# Altium PCB withoutTemplate.PcbDoc
Units mil, origin at the board's own origin, x right, y up, seen from the top; angles counter-clockwise.
Board outline 6000 x 4000 mil, 2 copper layers (Top Layer, Bottom Layer); 21 components, 96 nets, 125 pads, 0 vias.
Unrouted connection lines stored in the file: 35.
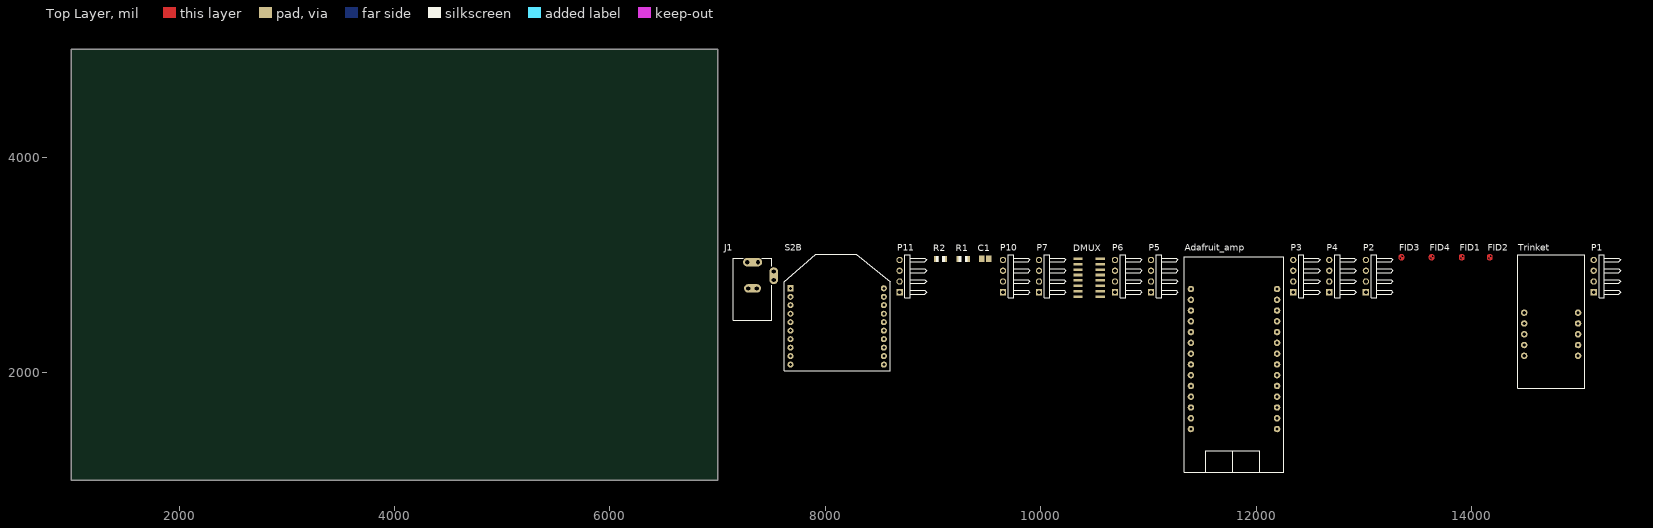
[diagram p0: Top Layer view]
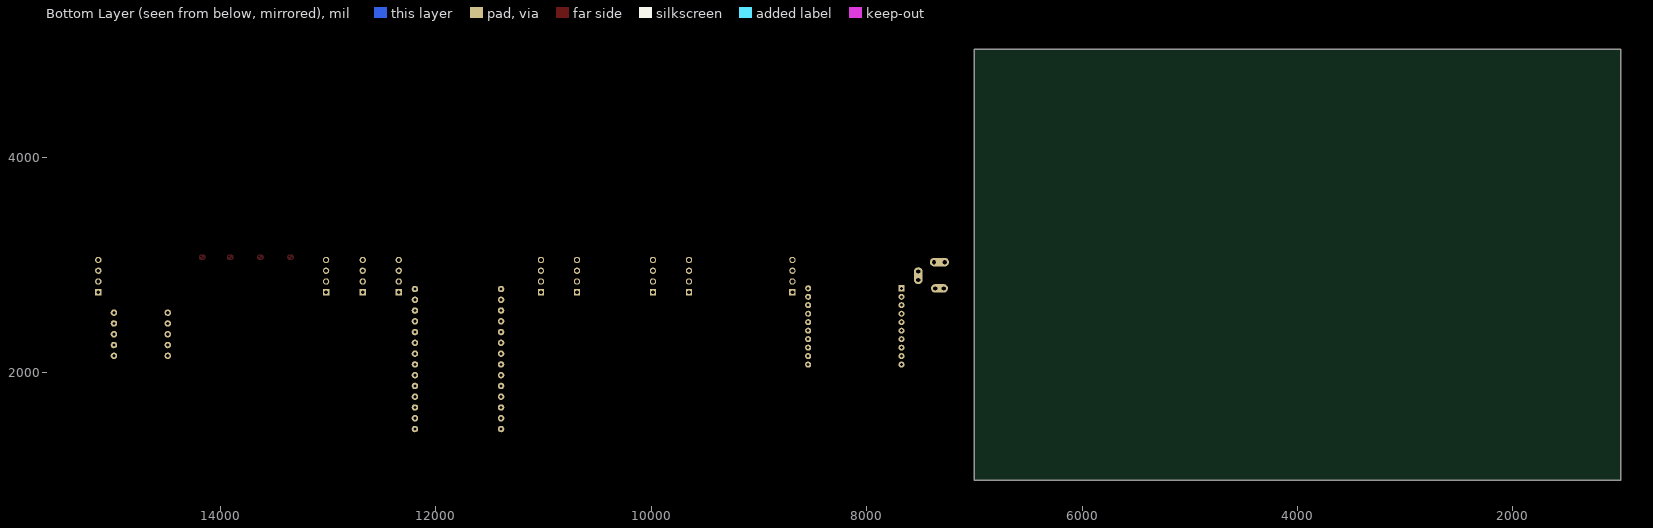
[diagram p1: Bottom Layer view, seen from below]

## Layer stack, top to bottom
Top Solder: solder mask 0.4, Solder Resist, Dk 3.5
Top Layer: signal copper 1.4
Dielectric 1: dielectric 12.6, FR-4, Dk 4.8
Bottom Layer: signal copper 1.4
Bottom Solder: solder mask 0.4, Solder Resist, Dk 3.5

## Board outline
1000,1000 7000,1000 7000,5000 1000,5000

## Design rules (kind name [scope] priority, off if disabled: settings)
Clearance [All] p1: gap=10
PolygonConnect [All] p1: connectstyle=Relief reliefconductorwidth=10 reliefentries=4 polygonreliefangle="90 Angle" airgapwidth=10
RoomDefinition BBB_Cape_template [InComponentClass('BBB_Cape_template')] p1: confinementstyle=ConfineIn formatcopy=TRUE lockcomponents=FALSE outline 7045,1065 15395,1065 15395,3205 7045,3205
RoutingVias [All] p1: holewidth=28 width=50 viastyle="Through Hole" minholewidth=28 minwidth=50 maxholewidth=28 maxwidth=50
SolderMaskExpansion [All] p1: expansion=4
UnpouredPolygon [All] p1: allowunpoured=FALSE
Width [All] p1: maxlimit=10 minlimit=10 preferedwidth=10
29 further rules are at their usual default settings.

## Classes and differential pairs
net class Xbee: DGND NetS2B_4 NetS2B_5 NetS2B_6 NetS2B_7 NetS2B_8 NetS2B_9 NetS2B_11 NetS2B_12 NetS2B_13 NetS2B_14 NetS2B_15 NetS2B_16 NetS2B_17 NetS2B_18 NetS2B_19 NetS2B_20 UART1_RXD UART1_TXD VDD_3V3B
net class Speaker: DGND NetAdafruit_amp_1 NetAdafruit_amp_2 NetAdafruit_amp_3 NetAdafruit_amp_4 NetAdafruit_amp_5 NetAdafruit_amp_6 NetAdafruit_amp_7 NetAdafruit_amp_8 NetAdafruit_amp_9 NetAdafruit_amp_10 NetAdafruit_amp_11 NetAdafruit_amp_12 NetAdafruit_amp_13 NetAdafruit_amp_16 NetAdafruit_amp_17 NetAdafruit_amp_18 NetAdafruit_amp_19 NetAdafruit_amp_20 NetAdafruit_amp_21 NetAdafruit_amp_22 NetAdafruit_amp_23 NetAdafruit_amp_24 NetAdafruit_amp_25 NetAdafruit_amp_26 NetAdafruit_amp_28 NetDMUX_3 NetDMUX_6 NetDMUX_9 NetDMUX_10 NetDMUX_11
net class Servo: AIN5 DGND EHRPWM1B NetAdafruit_amp_28 NetC1_1
net class Pin_Redef: I2C2_SCL I2C2_SDA
net class Motor: DGND EHRPWM2A EHRPWM2B GPIO0_27 GPIO1_15
net class LED: I2C2_SCL I2C2_SDA NetAdafruit_amp_28 NetP1_2 NetP1_3 NetP1_4 NetTrinket_3 NetTrinket_5 NetTrinket_6 NetTrinket_8 NetTrinket_10
net class Camera: NetP2_1 NetP2_2 NetP2_3 NetP2_4 NetP4_1 NetP4_2 NetP4_3 NetP4_4 NetP5_1 NetP5_2 NetP5_3 NetP5_4 NetP7_1 NetP7_2 NetP7_3 NetP7_4

## Components (designator, comment, footprint, x,y, rotation, side; value= is the part's Value field where it differs from the comment)
Adafruit_amp "Adafruit_2x2Amp" "adafruit_2x2w amp" 11335,1075 r0 top
C1 "47nF" C0805 9485,3055 r0 top
DMUX "CD74HC4067" so16 10450,2880 r90 top
FID1 "MECH-Fiducial" S_Fiducial 13910,3070 r90 top
FID2 "MECH-Fiducial" S_Fiducial 14170,3070 r90 top
FID3 "MECH-Fiducial" S_Fiducial 13350,3070 r90 top
FID4 "MECH-Fiducial" S_Fiducial 13630,3070 r90 top
J1 "PWR2.5" KLD-0202 7325,2485 r90 top
P1 "Header 4H" HDR1X4H 15135,2745 r90 top
P2 "Header 4H" HDR1X4H 13020,2745 r90 top
P3 "Header 4H" HDR1X4H 12345,2745 r90 top
P4 "Header 4H" HDR1X4H 12680,2745 r90 top
P5 "Header 4H" HDR1X4H 11025,2745 r90 top
P6 "Header 4H" HDR1X4H 10690,2745 r90 top
P7 "Header 4H" HDR1X4H 9985,2745 r90 top
P10 "Header 4H" HDR1X4H 9650,2745 r90 top
P11 "Header 4H" HDR1X4H 8690,2745 r90 top
R1 "6.7K" R0805 9280,3055 r0 top
R2 "3.3K" R0805 9070,3055 r0 top
S2B "XBEE" XBEE 8110,2565 r0 top
Trinket "Trinket8M" trinket 14430,1855 r0 top

## Footprints (in the part's own frame and the unit in brackets; to place one, negate y for a bottom-side part, rotate by r counter-clockwise, add the part's x,y. Pads: shape width x height; smd on the part's side, far side on the other; paste and mask are expansions set on the pad)
"adafruit_2x2w amp" [mil]
  round 60 hole 30: 1(60,1700) 2(60,1600) 3(60,1500) 4(60,1400) 5(60,1300) 6(60,1200) 7(60,1100) 8(60,1000) 9(60,900) 10(60,800) 11(60,700) 12(60,600) 13(60,500) 14(60,400) 15(860,400) 16(860,500) 17(860,600) 18(860,700) 19(860,800) 20(860,900) 21(860,1000) 22(860,1100) 23(860,1200) 24(860,1300) 25(860,1400) 26(860,1500) 27(860,1600) 28(860,1700)
  silkscreen extent 0,0 920,2000
C0805 [mil]
  rect 52x60 smd: 1(-33.46,0) 2(34,0)
HDR1X4H [mm] "Connector; Header; 4 Position; Right Angle"
  rect 1.5x1.5 hole 0.9: 1(0,0)
  round 1.5 hole 0.9: 2(2.54,0) 3(5.08,0) 4(7.62,0)
  silkscreen extent -1.27,-6.35 8.89,-1.27
KLD-0202 [mm] "DC Power Jack, 2.5mm, KLD Series, PCB Mount"
  oval 2x4.5 all layers, no hole: 1(13.7,0)
  round 1.5 hole 1: 1A(13.7,-1.25) 1B(13.7,1.25) 2A(7.5,-1) 2B(7.5,1) 3A(9.5,-5) 3B(11.5,-5)
  oval 2x4 all layers, no hole: 2(7.5,0)
  oval 4x2 all layers, no hole: 3(10.5,-5)
  silkscreen extent 0,-4.5 14.6,4.5
R0805 [mil]
  rect 44x56 smd: 1(-39.37,0) 2(40,0)
  silkscreen extent -42,-28 42,28
S_Fiducial [mil] "Fiducial"
  Top Layer region: 24.61,0 0,0 0,24.61 14.76,19.68 24.61,9.84
  Top Layer region: 0,-24.61 -14.76,-19.68 -24.61,-9.84 -24.61,0 0,0
  Top Layer lines w8: 0,24.61 ccw(c0,0) 0,-24.61 ccw(c0,0) 0,24.61
so16 [mil]
  rect 24x87 smd: 1(-175,-102.36) 2(-125,-102.36) 3(-75,-102.36) 4(-25,-102.36) 5(25,-102.36) 6(75,-102.36) 7(125,-102.36) 8(175,-102.36) 9(175,103) 10(125,103) 11(75,103) 12(25,103) 13(-25,103) 14(-75,103) 15(-125,103) 16(-175,103)
trinket [mil]
  round 60 hole 30: 1(60,700) 2(60,600) 3(60,500) 4(60,400) 5(60,300) 6(560,300) 7(560,400) 8(560,500) 9(560,600) 10(560,700)
  silkscreen extent 0,0 620,1240
XBEE [mil]
  rect 56x56 hole 28: 1(-433.07,217)
  round 56 hole 28: 2(-433.07,138) 3(-433.07,60) 4(-433.07,-19.68) 5(-433.07,-98.43) 6(-433.07,-177.17) 7(-433.07,-255.91) 8(-433.07,-334.65) 9(-433.07,-413.39) 10(-433.07,-492.13) 11(434,-492.13) 12(434,-413.39) 13(434,-334.65) 14(434,-255.91) 15(434,-177.17) 16(434,-98.43) 17(434,-19.68) 18(434,60) 19(434,138) 20(434,217)
  silkscreen extent -492,-551 493,532

## Part data
C1: library part C-USC0805
FID1 FID2 FID3 FID4: "Fiducial"
J1: "Low Voltage Power Supply Connector"
P1 P2 P3 P4 P5 P6 P7 P10 P11: "Header, 4-Pin, Right Angle"
R1 R2: library part R-US_R0805

## Nets (pads, with @x,y where several pads share a name; then routed paths per layer and width w, separated by ;. In a path a pad name is that pad's centre, name@x,y a point inside that pad or via, vN(x,y) a via of type N, cw(c..) or ccw(c..) an arc to the next point about the centre after c; other vN are vias at no path point)
AIN0: 
AIN1: 
AIN2: 
AIN3: 
AIN4: 
AIN5: R1.1 R2.2
AIN6: 
CLKOUT2: 
DGND: Adafruit_amp.14 Adafruit_amp.15 Adafruit_amp.27 C1.2 DMUX.7 DMUX.8 J1.2 J1.2A J1.2B P3.2 P3.4 P6.2 P6.4 P10.4 P11.4 R2.1 S2B.10
EHRPWM1A: 
EHRPWM1B: P10.2
EHRPWM2A: P3.1
EHRPWM2B: P6.1
GNDA_ADC: 
GPIO0_7: 
GPIO0_26: 
GPIO0_27: P3.3
GPIO1_12: 
GPIO1_13: 
GPIO1_14: 
GPIO1_15: P6.3
GPIO1_16: 
GPIO1_17: 
GPIO1_28: 
GPIO1_29: 
GPIO2_1: 
GPIO3_19: 
GPIO3_21: 
I2C1_SCL: 
I2C1_SDA: 
I2C2_SCL: Trinket.7
I2C2_SDA: Trinket.8
LCD_DATA0: 
LCD_DATA1: 
LCD_DATA2: 
LCD_DATA3: 
LCD_DATA4: 
LCD_DATA5: 
LCD_DATA6: 
LCD_DATA7: 
LCD_DATA8: 
LCD_DATA9: 
LCD_DATA10: 
LCD_DATA11: 
LCD_DATA12: 
LCD_DATA13: 
LCD_DATA14: 
LCD_DATA15: 
LCD_DE: 
LCD_HSYNC: 
LCD_PCLK: 
LCD_VSYNC: 
MMC1_CLK: 
MMC1_CMD: 
MMC1_DAT0: 
MMC1_DAT1: 
MMC1_DAT2: 
MMC1_DAT3: 
MMC1_DAT4: 
MMC1_DAT5: 
MMC1_DAT6: 
MMC1_DAT7: 
NetAdafruit_amp_1: Adafruit_amp.1 DMUX.4
NetAdafruit_amp_2: Adafruit_amp.2 DMUX.13
NetAdafruit_amp_3: Adafruit_amp.3 DMUX.14
NetAdafruit_amp_4: Adafruit_amp.4 DMUX.15
NetAdafruit_amp_5: Adafruit_amp.5 DMUX.12
NetAdafruit_amp_6: Adafruit_amp.6 DMUX.1
NetAdafruit_amp_7: Adafruit_amp.7 DMUX.5
NetAdafruit_amp_8: Adafruit_amp.8 DMUX.2
NetAdafruit_amp_28: Adafruit_amp.28 DMUX.16 J1.1 J1.1A J1.1B P1.1 P10.1 Trinket.1
NetC1_1: C1.1 P10.3 R1.2
NetJ1_3: J1.3 J1.3A J1.3B
NetP1_2: P1.2 Trinket.4
NetP1_4: P1.4 Trinket.2
NetTrinket_3: Trinket.3
PWR_BUT: 
SPI1_CS0: 
SPI1_D0: 
SPI1_D1: 
SPI1_SCLK: 
SYS_5V: 
SYS_RESETN: 
TIMER4: 
TIMER5: 
TIMER6: 
TIMER7: 
UART1_RXD: P11.2 S2B.2
UART1_TXD: P11.3 S2B.3
UART2_RXD: 
UART2_TXD: 
UART4_RXD: 
UART4_TXD: 
VDD_3V3B: P11.1 S2B.1
VDD_5V: 
VDD_ADC: 
pads on no net: Adafruit_amp.9 Adafruit_amp.10 Adafruit_amp.11 Adafruit_amp.12 Adafruit_amp.13 Adafruit_amp.16 Adafruit_amp.17 Adafruit_amp.18 Adafruit_amp.19 Adafruit_amp.20 Adafruit_amp.21 Adafruit_amp.22 Adafruit_amp.23 Adafruit_amp.24 Adafruit_amp.25 Adafruit_amp.26 DMUX.3 DMUX.6 DMUX.9 DMUX.10 DMUX.11 P1.3 P2.1 P2.2 P2.3 P2.4 P4.1 P4.2 P4.3 P4.4 P5.1 P5.2 P5.3 P5.4 P7.1 P7.2 P7.3 P7.4 S2B.4 S2B.5 S2B.6 S2B.7 S2B.8 S2B.9 S2B.11 S2B.12 S2B.13 S2B.14 S2B.15 S2B.16 S2B.17 S2B.18 S2B.19 S2B.20 Trinket.5 Trinket.6 Trinket.9 Trinket.10

## Text inside footprints (layer, text, board x,y; h text height)
J1: Mechanical 1 "Mech 2 - Clearance, move to internal plane if present" at 7125.56,2496.26 h11.81 r90; Mechanical 1 "Mech 1 - Slot cut-out" at 7105.87,2496.26 h11.81 r90; Mechanical 1 "Assign keep-out area to slot" at 7066.5,2496.26 h11.81 r90; Mechanical 1 "Alert PCB fab to slot details" at 7086.19,2496.26 h11.81 r90